# EAGLE board CT_schematic (EAGLE 7.6.0)

Size 100 x 80 mm. Coordinates in mm from the lower left corner, seen from the top.
Outline: 0,0 100,0 100,80 0,80 0,0
Copper layers (1*16): Top 0.035mm / dielectric 1.5mm / Bottom 0.035mm
Design rules "default": minimum track width 10mil, minimum drill 24mil, track to track 8mil, track to pad 8mil, pad to pad 8mil, via to via 8mil, smd to smd 8mil, copper to edge 40mil, drill to drill 8mil, minimum pad ring 10mil, minimum via ring 8mil, stop-mask expansion 4mil, vias tented up to drill 0mil, thermal gap 10mil

## Footprints (pad centres in the part's own frame; a part is rotated, then mirrored left to right if it is on the bottom)
C0603 = smd 0.8 x 0.8: 1 -0.762,0; 2 0.762,0
C0402 = smd 0.5 x 0.5: 1 -0.508,0; 2 0.508,0
C1210 = smd 1.2 x 2.5: 1 -1.524,0; 2 1.524,0
EXV-9H = smd 3.505 x 1.676: 1 -2.857,0; 2 2.857,0
L0603 = smd 0.8 x 0.8: 1 -0.762,0; 2 0.762,0
L1210 = smd 1.2 x 2.5: 1 -1.524,0; 2 1.524,0
PJ-037B_PACKAGE = drill 3.7 square: 1 12,0 | drill 3.2 square: 2 6,0
R0603 = smd 0.8 x 0.8: 1 -0.762,0; 2 0.762,0
UFQFPN32 = smd 0.6 x 0.3: 1 -2.35,1.75; 2 -2.35,1.25; 3 -2.35,0.75; 4 -2.35,0.25; 5 -2.35,-0.25; 6 -2.35,-0.75; 7 -2.35,-1.25; 8 -2.35,-1.75; 17 2.35,-1.75; 18 2.35,-1.25; 19 2.35,-0.75; 20 2.35,-0.25; 21 2.35,0.25; 22 2.35,0.75; 23 2.35,1.25; 24 2.35,1.75 | smd 0.3 x 0.6: 9 -1.75,-2.35; 10 -1.25,-2.35; 11 -0.75,-2.35; 12 -0.25,-2.35; 13 0.25,-2.35; 14 0.75,-2.35; 15 1.25,-2.35; 16 1.75,-2.35; 25 1.75,2.35; 26 1.25,2.35; 27 0.75,2.35; 28 0.25,2.35; 29 -0.25,2.35; 30 -0.75,2.35; 31 -1.25,2.35; 32 -1.75,2.35 | smd 3.45 x 3.45: EPAD 0,0
SSOP-16 = smd 1.981 x 0.356: 1 -2.464,2.223; 2 -2.464,1.587; 3 -2.464,0.953; 4 -2.464,0.318; 5 -2.464,-0.318; 6 -2.464,-0.953; 7 -2.464,-1.587; 8 -2.464,-2.223; 9 2.464,-2.223; 10 2.464,-1.587; 11 2.464,-0.953; 12 2.464,-0.318; 13 2.464,0.318; 14 2.464,0.953; 15 2.464,1.587; 16 2.464,2.223
182-009-MALE = drill 1.194 pad 1.524 octagon: 1 -5.537,10.923; 2 -2.769,10.923; 3 0,10.923; 4 2.769,10.923; 5 5.537,10.923; 6 -4.153,8.08; 7 -1.384,8.08; 8 1.384,8.08; 9 4.153,8.08 | hole 3.048: -12.446,9.501; 12.446,9.501
FCI_10118193-0001LF = smd 0.4 x 1.35: 1 -1.3,2.675; 2 -0.65,2.675; 3 0,2.675; 4 0.65,2.675; 5 1.3,2.675 | smd 1.6 x 1.4: 6 -3.2,2.45; 7 3.2,2.45 | smd 1.9 x 1.9: 8 -1.2,0; 9 1.2,0 | hole 0.5: -3.3,0; 3.3,0
SOT143B = smd 1 x 0.7: 1 -0.75,-1 | smd 0.6 x 0.7: 2 0.95,-1; 3 0.95,1; 4 -0.95,1
ABLS-25.000MHZ-B2F-T = smd 5.6 x 2.8: 1 -3.81,0; 2 5.69,0
WSON-8 = smd 0.3 x 0.6: 1 -0.75,0; 2 0.05,0; 3 0.85,0; 4 1.65,0; 5 1.65,3.8; 6 0.85,3.8; 7 0.05,3.8; 8 -0.75,3.8 | smd 3 x 2.6: PAD 0.45,1.9
SON-6 = smd 0.55 x 0.3: 1 -0.355,0.5 | smd 0.52 x 0.3: 2 -0.37,0; 3 -0.37,-0.5; 4 0.37,-0.5; 5 0.37,0; 6 0.37,0.5
SW_4-1437565-2 = smd 1.4 x 2.1: 1 -2.23,4.55; 2 -2.23,-4.55; 3 2.23,4.55; 4 2.23,-4.55
LGM67K-G1J2-24-Z = smd 0.8 x 1.4: A -2,0; C 0,0
NC7SZ125M5X = smd 1.3 x 0.7: 1 -1.3,0.95; 2 -1.3,0; 3 -1.3,-0.95; 4 1.3,-0.95; 5 1.3,0.95

## Placement (x,y rotation side)
C1  1e-07  [C0603]  -19.05,59.69 0 top  (outside the outline)
C2  1e-07  [C0603]  -22.86,59.69 0 top  (outside the outline)
C3  4.7e-06  [C0603]  -60.96,53.34 0 top  (outside the outline)
C4  1e-07  [C0603]  -26.67,59.69 0 top  (outside the outline)
C5  4.7e-06  [C0603]  -64.77,53.34 0 top  (outside the outline)
C6  1e-08  [C0603]  -30.48,59.69 0 top  (outside the outline)
C7  1e-08  [C0603]  -34.29,59.69 0 top  (outside the outline)
C8  1e-06  [C0603]  -38.1,59.69 0 top  (outside the outline)
C9  1e-11  [C0402]  -26.67,64.77 0 top  (outside the outline)
C10  1e-11  [C0402]  -30.48,64.77 0 top  (outside the outline)
C11  1e-06  [C0603]  -41.91,59.69 0 top  (outside the outline)
C12  1e-06  [C0603]  -45.72,59.69 0 top  (outside the outline)
C13  2.2e-07  [C0603]  -15.24,59.69 0 top  (outside the outline)
C14  1e-06  [C0603]  -49.53,59.69 0 top  (outside the outline)
C15  1e-06  [C0603]  -53.34,59.69 0 top  (outside the outline)
C16  1e-08  [C0402]  -34.29,64.77 0 top  (outside the outline)
C17  1e-05  [C1210]  -49.53,46.99 0 top  (outside the outline)
C18  1e-05  [C1210]  -55.88,46.99 0 top  (outside the outline)
C19  1e-07  [C0402]  -38.1,64.77 0 top  (outside the outline)
C20  0.0001  [EXV-9H]  -48.26,38.1 0 top  (outside the outline)
C21  0.0001  [EXV-9H]  -59.69,38.1 0 top  (outside the outline)
C22  1e-08  [C0402]  -41.91,64.77 0 top  (outside the outline)
F1  240.0  [L0603]  -57.15,59.69 0 top  (outside the outline)
I1  1e-05  [L1210]  -62.23,46.99 0 top  (outside the outline)
J1  PJ-037B  [PJ-037B_PACKAGE]  -67.31,7.62 0 top  (outside the outline)
R1  10000.0  [R0603]  -41.91,53.34 0 top  (outside the outline)
R2  1000.0  [R0603]  -60.96,59.69 0 top  (outside the outline)
R3  1270.0  [R0603]  -64.77,59.69 0 top  (outside the outline)
R4  4700.0  [R0603]  -15.24,64.77 0 top  (outside the outline)
R5  100000.0  [R0603]  -21.59,53.34 0 top  (outside the outline)
R6  100000.0  [R0603]  -26.67,53.34 0 top  (outside the outline)
R7  1500.0  [R0603]  -19.05,64.77 0 top  (outside the outline)
R8  1000.0  [R0603]  -22.86,64.77 0 top  (outside the outline)
R9  10000.0  [R0603]  -46.99,53.34 0 top  (outside the outline)
R10  10000.0  [R0603]  -52.07,53.34 0 top  (outside the outline)
R11  18000.0  [R0603]  -57.15,53.34 0 top  (outside the outline)
R12  470000.0  [R0603]  -31.75,53.34 0 top  (outside the outline)
R13  120000.0  [R0603]  -36.83,53.34 0 top  (outside the outline)
U1  stm32f042k6u6  [UFQFPN32]  -62.23,27.94 0 top  (outside the outline)
U2  LTC2804CGN-1#PBF  [SSOP-16]  -48.26,27.94 0 top  (outside the outline)
U3  182-009-113R531  [182-009-MALE]  -36.83,6.35 0 top  (outside the outline)
U4  10118193-0001LF  [FCI_10118193-0001LF]  -38.1,38.1 0 top  (outside the outline)
U5  prtr5v0u2ax  [SOT143B]  -54.61,64.77 0 top  (outside the outline)
U6  ABLS-25.000MHZ-B2F-T  [ABLS-25.000MHZ-B2F-T]  -26.67,46.99 0 top  (outside the outline)
U7  LP3878SDX-ADJ/NOPB  [WSON-8]  -30.48,36.83 0 top  (outside the outline)
U8  TPS3895ADRYR  [SON-6]  -58.42,63.5 0 top  (outside the outline)
U9  4-1437565-2  [SW_4-1437565-2]  -27.94,27.94 0 top  (outside the outline)
U10  Q65110A2395  [LGM67K-G1J2-24-Z]  -38.1,46.99 0 top  (outside the outline)
U11  nc7sz125m5x  [NC7SZ125M5X]  -15.24,53.34 0 top  (outside the outline)

## Library data of the parts
C1-C22 F1 I1 J1 R1-R13 U1-U11 = circuit_tree

## Nets
CLK_CRYSTAL_U1_2: C9.1 U1.2 U6.1
CLK_CRYSTAL_U1_3: C10.1 U1.3 U6.2
GND: C1.2 C2.2 C3.2 C4.2 C5.2 C6.2 C7.2 C8.2 C9.2 C10.2 C11.2 C12.2 C14.2 C15.2 C16.2 C17.2 C18.2 C19.2 C20.2 C21.2 C22.2 J1.2 R2.2 R8.2 R11.2 R13.2 U1.EPAD U2.8 U3.5 U4.5 U4.6 U4.7 U4.8 U4.9 U5.1 U7.3 U7.PAD U8.2 U10.C U11.1 U11.3
NET_U1_4: R4.1 U1.4 U11.4
NET_U1_5: C6.1 C7.1 C8.1 F1.1 U1.5
NET_U1_31: R3.1 U1.31 U10.A
NET_U1_32: R1.1 U1.32 U9.3 U9.4
NET_U2_6: C11.1 U2.6
NET_U2_7: C13.1 I1.2 U2.7
NET_U2_9: C12.1 U2.9
NET_U2_10: C13.2 U2.10
NET_U2_11: R5.1 U2.11
NET_U3_2: U2.1 U3.2
NET_U3_3: U2.3 U3.3
NET_U3_7: U2.2 U3.7
NET_U3_8: U2.4 U3.8
NET_U5_4: U4.1 U5.4
NET_U7_1: C16.1 U7.1
NET_U7_6: R7.2 R8.1 U7.6
NET_U7_8: R6.1 U7.8
NET_U8_1: R10.1 R11.1 U8.1
NET_U8_3: R12.2 R13.1 U8.3
NET_U8_4: R9.1 U8.4 U11.2
NET_U9_1: R2.1 U9.1 U9.2
PROC_USART2_CTS: U1.6 U2.13
PROC_USART2_RTS: U1.7 U2.15
PROC_USART2_RX: U1.9 U2.16
PROC_USART2_TX: U1.8 U2.14
PROC_USB_DM: U1.21 U4.2 U5.3
PROC_USB_DP: U1.22 U4.3 U5.2
VCC_S1_11V6: C17.1 C20.1 C21.1 J1.1 R6.2 U7.4
VCC_TIER1_2V5: C1.1 C2.1 C3.1 C4.1 C5.1 C14.1 C15.1 C18.1 C19.1 C22.1 F1.2 I1.1 R1.2 R3.2 R4.2 R5.2 R7.1 R9.2 R10.2 R12.1 U1.1 U1.17 U2.5 U2.12 U7.5 U8.6 U11.5

## Tracks (layer width: path | path; a pad name or v marks a point on that pad's centre or on a via)
CLK_CRYSTAL_U1_2  (2 unrouted)
CLK_CRYSTAL_U1_3  (2 unrouted)
GND  (40 unrouted)
NET_U1_4  (2 unrouted)
NET_U1_5  (4 unrouted)
NET_U1_31  (2 unrouted)
NET_U1_32  (3 unrouted)
NET_U2_6  (1 unrouted)
NET_U2_7  (2 unrouted)
NET_U2_9  (1 unrouted)
NET_U2_10  (1 unrouted)
NET_U2_11  (1 unrouted)
NET_U3_2  (1 unrouted)
NET_U3_3  (1 unrouted)
NET_U3_7  (1 unrouted)
NET_U3_8  (1 unrouted)
NET_U5_4  (1 unrouted)
NET_U7_1  (1 unrouted)
NET_U7_6  (2 unrouted)
NET_U7_8  (1 unrouted)
NET_U8_1  (2 unrouted)
NET_U8_3  (2 unrouted)
NET_U8_4  (2 unrouted)
NET_U9_1  (2 unrouted)
PROC_USART2_CTS  (1 unrouted)
PROC_USART2_RTS  (1 unrouted)
PROC_USART2_RX  (1 unrouted)
PROC_USART2_TX  (1 unrouted)
PROC_USB_DM  (2 unrouted)
PROC_USB_DP  (2 unrouted)
VCC_S1_11V6  (5 unrouted)
VCC_TIER1_2V5  (26 unrouted)